# EAGLE board Wheel (EAGLE 9.6.2)
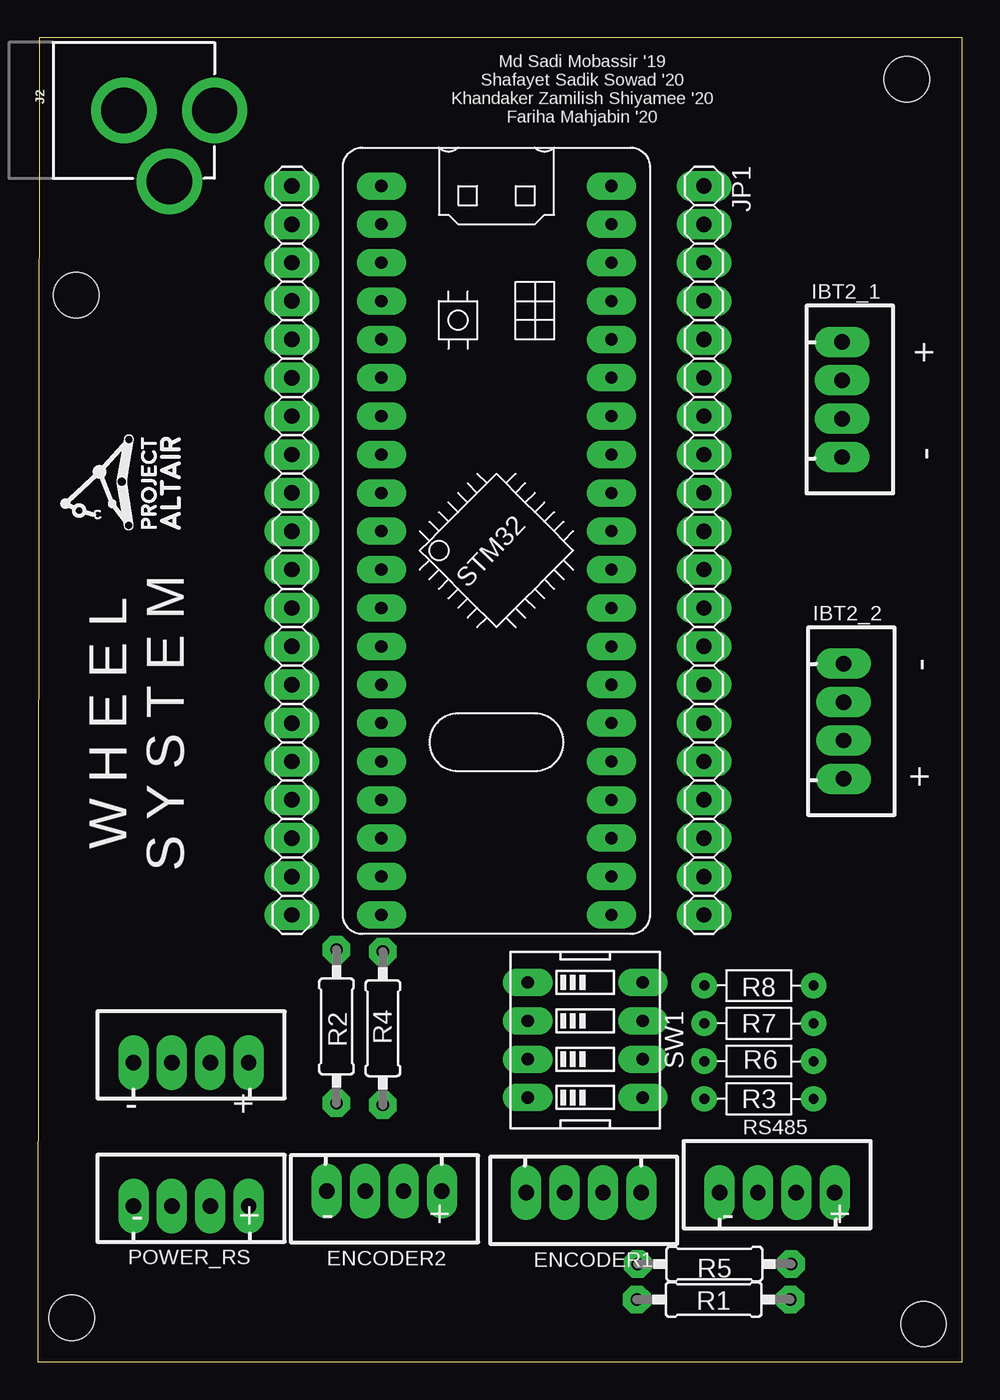
[diagram p0: board, top side]
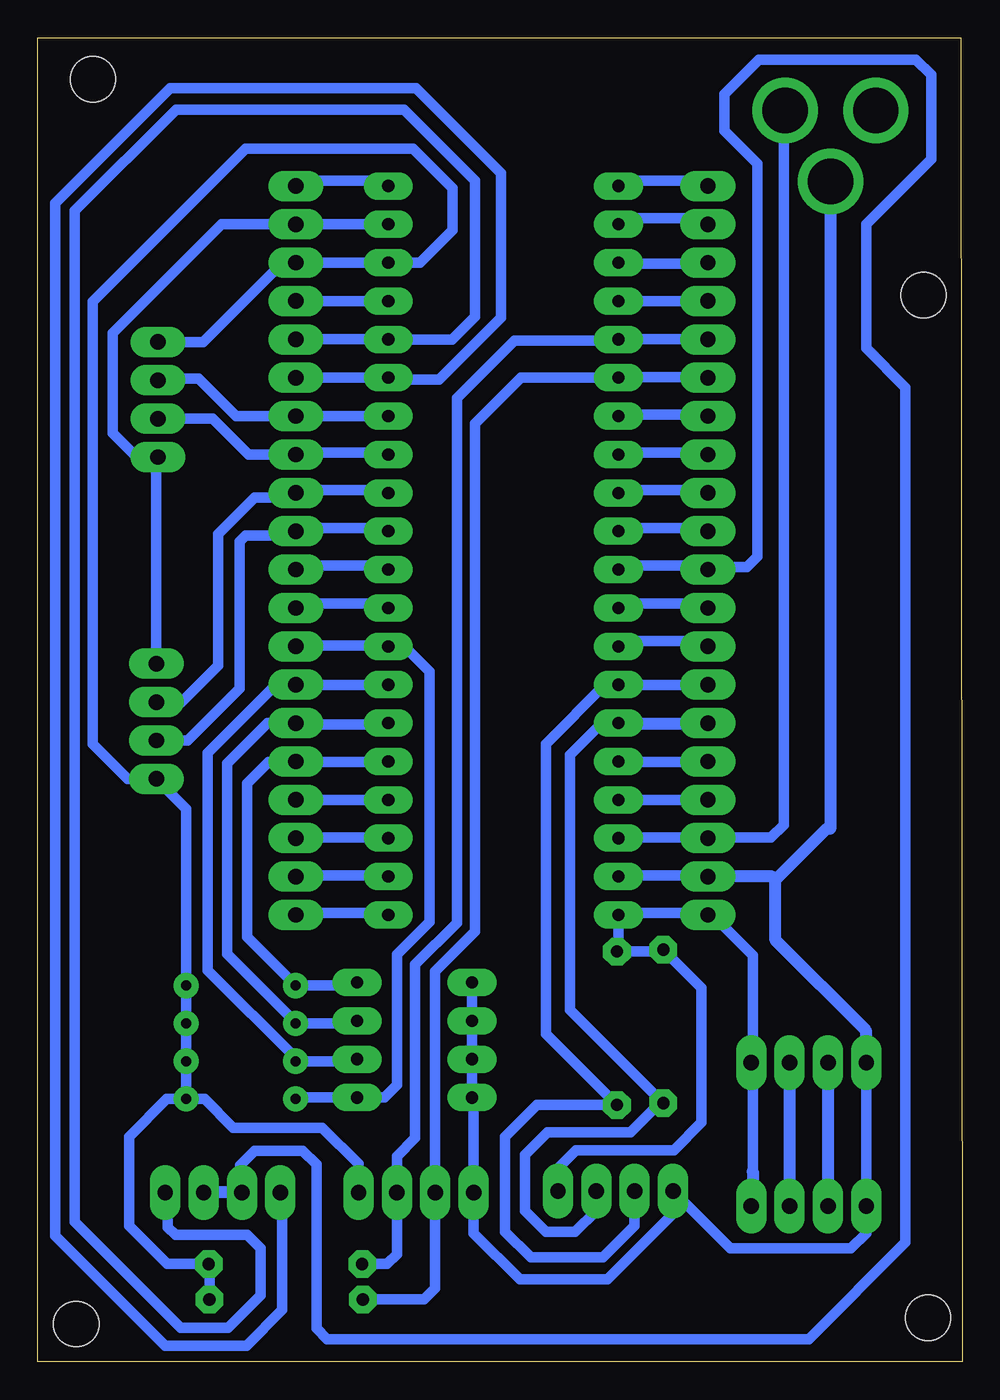
[diagram p1: board, bottom side, seen from below]

Size 61.2 x 87.65 mm. Coordinates in mm from the lower left corner, seen from the top.
Outline: 0,0 61.2,0 61.2,87.65 0.1,87.65 0,0
Copper layers (1*16): Top 0.035mm / dielectric 1.5mm / Bottom 0.035mm
Design rules "default *": minimum track width 0.4mm, minimum drill 0.65mm, track to track 0.5mm, track to pad 0.5mm, pad to pad 0.5mm, via to via 0.5mm, smd to smd 30mil, copper to edge 0.7mm, drill to drill 15mil, minimum pad ring 20mil, minimum via ring 8mil, stop-mask expansion 4mil, vias tented up to drill 0mil, thermal gap 10mil
Holes 3 mm at 57.55,84.9 2.25,2.9 58.65,2.5 2.55,70.6

## Footprints (pad centres in the part's own frame; a part is rotated, then mirrored left to right if it is on the bottom)
JST-XH-04-PACKAGE-LONG-PAD = drill 1.016 long: 1 -3.81,0; 2 -1.27,0; 3 1.27,0; 4 3.81,0
POWER_JACK = drill 2.997 pad 4.318: GND 0,7.7; GNDBREAK 4.7,10.7; PWR 0,13.7
1X20 = drill 1.016 long: 1 -24.13,0; 2 -21.59,0; 3 -19.05,0; 4 -16.51,0; 5 -13.97,0; 6 -11.43,0; 7 -8.89,0; 8 -6.35,0; 9 -3.81,0; 10 -1.27,0; 11 1.27,0; 12 3.81,0; 13 6.35,0; 14 8.89,0; 15 11.43,0; 16 13.97,0; 17 16.51,0; 18 19.05,0; 19 21.59,0; 20 24.13,0
0207/10 = drill 0.813 octagon: 1 -5.08,0; 2 5.08,0
RESAD724W46L381D178B = drill 0.66 pad 1.26: 1 -3.62,0; 2 3.62,0
EDG-04 = drill 0.813 long: 1 -3.81,-3.81; 2 -1.27,-3.81; 3 1.27,-3.81; 4 3.81,-3.81; 5 3.81,3.81; 6 1.27,3.81; 7 -1.27,3.81; 8 -3.81,3.81
BLUE_PILL = drill 0.8 long: P$1 -7.62,15.24; P$2 -7.62,12.7; P$3 -7.62,10.16; P$4 -7.62,7.62; P$5 -7.62,5.08; P$6 -7.62,2.54; P$7 -7.62,0; P$8 -7.62,-2.54; P$9 -7.62,-5.08; P$10 -7.62,-7.62; P$11 -7.62,-10.16; P$12 -7.62,-12.7; P$13 -7.62,-15.24; P$14 -7.62,-17.78; P$15 -7.62,-20.32; P$16 -7.62,-22.86; P$17 -7.62,-25.4; P$18 -7.62,-27.94; P$19 -7.62,-30.48; P$20 -7.62,-33.02; P$21 7.62,15.24; P$22 7.62,12.7; P$23 7.62,10.16; P$24 7.62,7.62; P$25 7.62,5.08; P$26 7.62,2.54; P$27 7.62,0; P$28 7.62,-2.54; P$29 7.62,-5.08; P$30 7.62,-7.62; P$31 7.62,-10.16; P$32 7.62,-12.7; P$33 7.62,-15.24; P$34 7.62,-17.78; P$35 7.62,-20.32; P$36 7.62,-22.86; P$37 7.62,-25.4; P$38 7.62,-27.94; P$39 7.62,-30.48; P$40 7.62,-33.02

## Placement (x,y rotation side)
ENCODER1  JST-XH-04-PIN-LONG-PAD  [JST-XH-04-PACKAGE-LONG-PAD]  36.15,11.2 180 top
ENCODER2  JST-XH-04-PIN-LONG-PAD  [JST-XH-04-PACKAGE-LONG-PAD]  22.95,11.3 180 top
IBT2_1  JST-XH-04-PIN-LONG-PAD  [JST-XH-04-PACKAGE-LONG-PAD]  53.25,63.7 270 top
IBT2_2  JST-XH-04-PIN-LONG-PAD  [JST-XH-04-PACKAGE-LONG-PAD]  53.35,42.4 270 top
J2  POWER_JACK  [POWER_JACK]  -1.99,82.84 270 top
JP1  [1X20]  44.11,53.71 270 top
JP2  [1X20]  16.83,53.71 270 top
POWER_RS  JST-XH-04-PIN-LONG-PAD  [JST-XH-04-PACKAGE-LONG-PAD]  10.15,10.3 0 top
POWER_RS1  JST-XH-04-PIN-LONG-PAD  [JST-XH-04-PACKAGE-LONG-PAD]  10.15,19.8 0 top
R1  [0207/10]  44.75,4.12 180 top
R2  [0207/10]  19.78,22.2 270 top
R3  [RESAD724W46L381D178B]  47.75,17.4 180 top
R4  [0207/10]  22.85,22.08 270 top
R5  [0207/10]  44.8,6.47 180 top
R6  [RESAD724W46L381D178B]  47.75,19.9 180 top
R7  [RESAD724W46L381D178B]  47.75,22.4 180 top
R8  [RESAD724W46L381D178B]  47.75,24.9 180 top
RS485  JST-XH-04-PIN-LONG-PAD  [JST-XH-04-PACKAGE-LONG-PAD]  48.95,11.2 0 top
SW1  [EDG-04]  36.25,21.3 270 top
U$1  [BLUE_PILL]  30.37,62.6 0 top
U$3  ALTAIR_SMALL  [ALTAIR_SMALL]  10.05,54.5 90 top

## Library data of the parts
ENCODER1 ENCODER2 IBT2_1 IBT2_2 POWER_RS POWER_RS1 RS485 = JST
J2 = J-Generic-5.5mm-Barrel-Jack; DPN: CP-202A-ND; MPN: PJ-202A
JP1 JP2 = pinhead
R1 R2 R4 R5 = rcl; SPICEPREFIX: R
R3 R6-R8 = Resistor; CATEGORY: Resistor; SUB-CATEGORY: Fixed
SW1 = special
U$1 = BluePill
U$3 = Altair Small

## Nets
3_3V: ENCODER2.1 JP2.20 POWER_RS1.4 POWER_RS.4 R2.1 R4.1 U$1.P$20
3_3V1: ENCODER1.1 IBT2_1.1 IBT2_2.4 JP1.3 R1.1 R3.1 R5.1 R6.1 R7.1 R8.1 U$1.P$23
5V: J2.PWR JP2.18 U$1.P$18
A: POWER_RS1.2 POWER_RS.2
B: POWER_RS1.3 POWER_RS.3
GND: ENCODER1.4 ENCODER2.4 J2.GNDBREAK JP2.19 POWER_RS1.1 POWER_RS.1 SW1.1 SW1.2 SW1.3 SW1.4 U$1.P$19
GND1: IBT2_1.4 IBT2_2.1 JP1.2 U$1.P$22
M1LPWM: IBT2_1.3 JP1.8 U$1.P$28
M1RPWM: IBT2_1.2 JP1.7 U$1.P$27
M2LPWM: IBT2_2.3 JP1.10 U$1.P$30
M2RPWM: IBT2_2.2 JP1.9 U$1.P$29
N$1: JP1.1 U$1.P$21
N$4: JP1.4 U$1.P$24
N$6: J2.GND
N$11: JP1.11 U$1.P$31
N$12: JP1.12 U$1.P$32
N$17: JP1.17 U$1.P$37
N$18: JP1.18 U$1.P$38
N$19: JP1.19 U$1.P$39
N$20: JP1.20 U$1.P$40
N$21: JP2.1 U$1.P$1
N$22: JP2.2 U$1.P$2
N$23: JP2.3 U$1.P$3
N$24: JP2.4 U$1.P$4
N$27: JP2.7 U$1.P$7
N$29: JP2.9 U$1.P$9
N$30: JP2.10 U$1.P$10
N$33: JP2.13 U$1.P$13
N$36: JP2.16 U$1.P$16
N$37: JP2.17 U$1.P$17
PA0: JP1.16 R8.2 SW1.8 U$1.P$36
PA1: JP1.15 R7.2 SW1.7 U$1.P$35
PA2: JP1.14 R6.2 SW1.6 U$1.P$34
PA3: JP1.13 R3.2 SW1.5 U$1.P$33
PA8: ENCODER1.2 JP2.5 R5.2 U$1.P$5
PA9: ENCODER1.3 JP2.6 R1.2 U$1.P$6
PA10: JP2.8 U$1.P$8
PB3: JP2.11 RS485.2 RS485.3 U$1.P$11
PB4: JP2.12 U$1.P$12
PB6: ENCODER2.3 JP2.14 R4.2 U$1.P$14
PB7: ENCODER2.2 JP2.15 R2.2 U$1.P$15
PB10: JP1.6 RS485.1 U$1.P$26
PB11: JP1.5 RS485.4 U$1.P$25

## Tracks (layer width: path | path; a pad name or v marks a point on that pad's centre or on a via)
3_3V
  Bottom 0.7: 13.86,12.6 13.86,19.7 13.86,26.91 16.53,29.58 JP2.20 17.05,29.7 22.35,29.7 U$1.P$20 22.75,27.26 R4.1 19.9,27.16 R2.1 17.25,24.75 17.25,15.84 19.09,14 25.56,14 26.76,12.8 ENCODER2.1
  Bottom 0.8: 13.86,12.6 13.86,10.4 POWER_RS.4 | POWER_RS1.4 13.86,19.7
3_3V1
  Bottom 0.7: R8.1 R6.1 R3.1 | R7.1 R8.1 | R8.1 51.37,36.61 IBT2_2.4 55.24,38.59 57.55,40.9 57.55,70.17 47.42,80.3 36.35,80.3 33.75,77.7 33.75,74.9 35.89,72.76 U$1.P$23 JP1.3 44.99,72.76 50.24,67.51 IBT2_1.1 | ENCODER1.1 39.96,13.1 42.36,15.5 48.25,15.5 50.15,17.4 R3.1 | R1.1 49.83,6.42 R5.1 52.62,6.47 55.15,9 55.15,14.9 52.65,17.4 R3.1
5V
  Bottom 0.7: 17.05,34.7 22.35,34.7 U$1.P$18 | 17.05,34.7 JP2.18 | J2.PWR 11.81,82.74 11.81,35.54 12.65,34.7 17.05,34.7
A
  Bottom 0.8: POWER_RS1.2 POWER_RS.2
B
  Bottom 0.8: POWER_RS1.3 POWER_RS.3
GND
  Bottom 0.7: U$1.P$19 22.35,32.2 17.05,32.2 JP2.19 | SW1.1 SW1.2 SW1.3 SW1.4 32.34,17.39 ENCODER1.4 32.34,8.5 29.29,5.45 23.5,5.45 19.14,9.8 ENCODER2.4 15.34,7.5 7.35,7.5 6.34,8.51 POWER_RS.1 POWER_RS1.1
  Bottom 0.8: POWER_RS1.1 6.34,21.89 12.35,27.9 12.35,31.9 | 12.35,31.9 12.57,32.12 JP2.19 | 12.35,31.9 8.95,35.3 8.75,35.3 8.71,35.34 J2.GNDBREAK
GND1
  Bottom 0.7: 53.35,59.79 54.54,59.79 56.23,61.48 56.23,68.1 49.02,75.3 JP1.2 U$1.P$22 | 53.35,59.79 IBT2_2.1 | IBT2_1.4 53.35,59.79
M1LPWM
  Bottom 0.7: U$1.P$28 38.35,60.2 43.85,60.2 JP1.8 47.25,60.06 49.62,62.43 IBT2_1.3
M1RPWM
  Bottom 0.7: U$1.P$27 JP1.7 48.05,62.6 50.55,65.1 53.12,65.1 IBT2_1.2
M2LPWM
  Bottom 0.7: U$1.P$30 38.35,55.2 43.85,55.2 JP1.10 44.35,54.7 47.45,54.7 47.85,54.3 47.85,44.57 51.29,41.13 IBT2_2.3
M2RPWM
  Bottom 0.7: U$1.P$29 38.35,57.7 43.85,57.7 JP1.9 44.35,57.2 46.85,57.2 49.25,54.8 49.25,46.1 51.68,43.67 IBT2_2.2
N$1
  Bottom 0.7: U$1.P$21 38.35,78.2 43.85,78.2 JP1.1
N$4
  Bottom 0.7: U$1.P$24 38.35,70.2 43.85,70.2 JP1.4
N$11
  Bottom 0.7: U$1.P$31 38.35,52.7 43.85,52.7 JP1.11
N$12
  Bottom 0.7: U$1.P$32 38.35,50.2 43.85,50.2 JP1.12
N$17
  Bottom 0.7: JP1.17 U$1.P$37
N$18
  Bottom 0.7: U$1.P$38 38.35,34.7 43.85,34.7 JP1.18
N$19
  Bottom 0.7: U$1.P$39 38.35,32.2 43.85,32.2 JP1.19
N$20
  Bottom 0.7: U$1.P$40 38.35,29.7 43.85,29.7 JP1.20
N$21
  Bottom 0.7: U$1.P$1 22.35,78.2 17.05,78.2 JP2.1
N$22
  Bottom 0.7: U$1.P$2 22.35,75.7 17.05,75.7 JP2.2
N$23
  Bottom 0.7: U$1.P$3 22.35,72.7 17.05,72.7 JP2.3
N$24
  Bottom 0.7: U$1.P$4 22.35,70.2 17.05,70.2 JP2.4
N$27
  Bottom 0.7: U$1.P$7 22.35,62.7 17.05,62.7 JP2.7
N$29
  Bottom 0.7: U$1.P$9 22.35,57.7 17.05,57.7 JP2.9
N$30
  Bottom 0.7: U$1.P$10 22.35,55.2 17.05,55.2 JP2.10
N$33
  Bottom 0.7: U$1.P$13 22.35,47.7 17.05,47.7 JP2.13
N$36
  Bottom 0.7: U$1.P$16 22.35,39.7 17.05,39.7 JP2.16
N$37
  Bottom 0.7: JP2.17 U$1.P$17
PA0
  Bottom 0.7: 43.85,39.7 45.92,39.7 47.35,38.27 47.35,28.12 R8.2 40.27,24.9 SW1.8 | 43.85,39.7 38.35,39.7 U$1.P$36 | 43.85,39.7 JP1.16
PA1
  Bottom 0.7: U$1.P$35 38.35,42.2 43.85,42.2 JP1.15 45.97,42.28 48.65,39.6 48.65,27 44.13,22.48 R7.2 40.23,22.4 SW1.7
PA2
  Bottom 0.7: U$1.P$34 38.01,44.8 44.09,44.8 JP1.14 44.18,44.89 45.36,44.89 49.95,40.3 49.95,25.92 44.13,20.1 R6.2 41.33,19.9 41.43,20 40.03,20 SW1.6
PA3
  Bottom 0.7: JP1.13 44.08,47.4 38.03,47.4 U$1.P$33 37.89,47.46 37.01,47.46 35.25,45.7 35.25,29.11 37.41,26.95 37.41,18.33 38.25,17.49 SW1.5 44.03,17.5 R3.2
PA8
  Bottom 0.7: JP2.5 17.05,67.7 22.35,67.7 U$1.P$5 22.77,67.6 29.65,67.6 33.45,63.8 33.45,29.06 36.21,26.3 36.21,14.81 37.42,13.6 ENCODER1.2 37.42,7.13 38.08,6.47 R5.2
PA9
  Bottom 0.7: JP2.6 17.05,65.2 22.35,65.2 U$1.P$6 29.21,65.14 32.25,62.1 32.25,28.5 34.91,25.84 34.91,11.23 ENCODER1.3 34.88,4.86 35.62,4.12 R1.2
PA10
  Bottom 0.7: U$1.P$8 22.35,60.2 17.05,60.2 JP2.8
PB3
  Bottom 0.7: U$1.P$11 22.35,52.7 17.05,52.7 JP2.11 16.67,52.6 14.25,52.6 13.55,53.3 13.55,79.3 15.75,81.5 15.75,83.9 13.45,86.2 3.05,86.2 2.05,85.2 2.05,79.6 6.35,75.3 6.35,67.1 3.75,64.5 3.75,7.9 10.15,1.5 42.05,1.5 42.75,2.2 42.75,13.07 43.65,13.98 46.83,13.98 47.8,13 47.8,11.32 RS485.2
  Bottom 0.8: RS485.2 RS485.3
PB4
  Bottom 0.7: U$1.P$12 22.35,50.2 17.05,50.2 JP2.12
PB6
  Bottom 0.7: JP2.14 16.85,44.8 22.73,44.8 U$1.P$14 23.63,44.82 27.55,40.9 27.55,21.7 R4.2 28.15,17 30.25,14.9 30.25,8.6 28.55,6.9 23.78,6.9 21.68,9 ENCODER2.3
PB7
  Bottom 0.7: U$1.P$15 22.35,42.2 17.05,42.2 JP2.15 23.83,42.28 25.95,40.16 25.95,23.29 R2.2 20.03,17.12 21.95,15.2 27.45,15.2 28.95,13.7 28.95,10 27.55,8.6 25.62,8.6 24.22,10 ENCODER2.2
PB10
  Bottom 0.7: JP1.6 U$1.P$26 37.88,65.03 34.63,65.03 30.53,69.12 30.53,78.68 36.15,84.3 52.44,84.3 60.05,76.7 60.05,8.33 52.78,1.06 47.38,1.06 45.02,3.42 45.02,11.08 RS485.1
PB11
  Bottom 0.7: JP1.5 43.85,67.7 38.35,67.7 U$1.P$25 33.77,67.68 32.25,69.2 32.25,78.2 36.95,82.9 52.05,82.9 58.75,76.2 58.75,9.26 51.75,2.26 48.59,2.26 46.45,4.4 46.45,7.5 47.35,8.4 52.08,8.4 52.58,8.9 52.58,11.02 RS485.4

## Text on the board
tNames: Md Sadi Mobassir '19 / Shafayet Sadik Sowad '20 / Khandaker Zamilish Shiyamee '20 / Fariha Mahjabin '20 | - + | W H E E L / S Y S T E M | + - | - + | - + | - + | - +